# Altium PCB Motor_Controller.PcbDoc
Units mil, origin at the board's own origin, x right, y up, seen from the top; angles counter-clockwise.
Board outline 2175 x 1650 mil, 2 copper layers (Top Layer, Bottom Layer); 86 components, 62 nets, 296 pads, 37 vias.
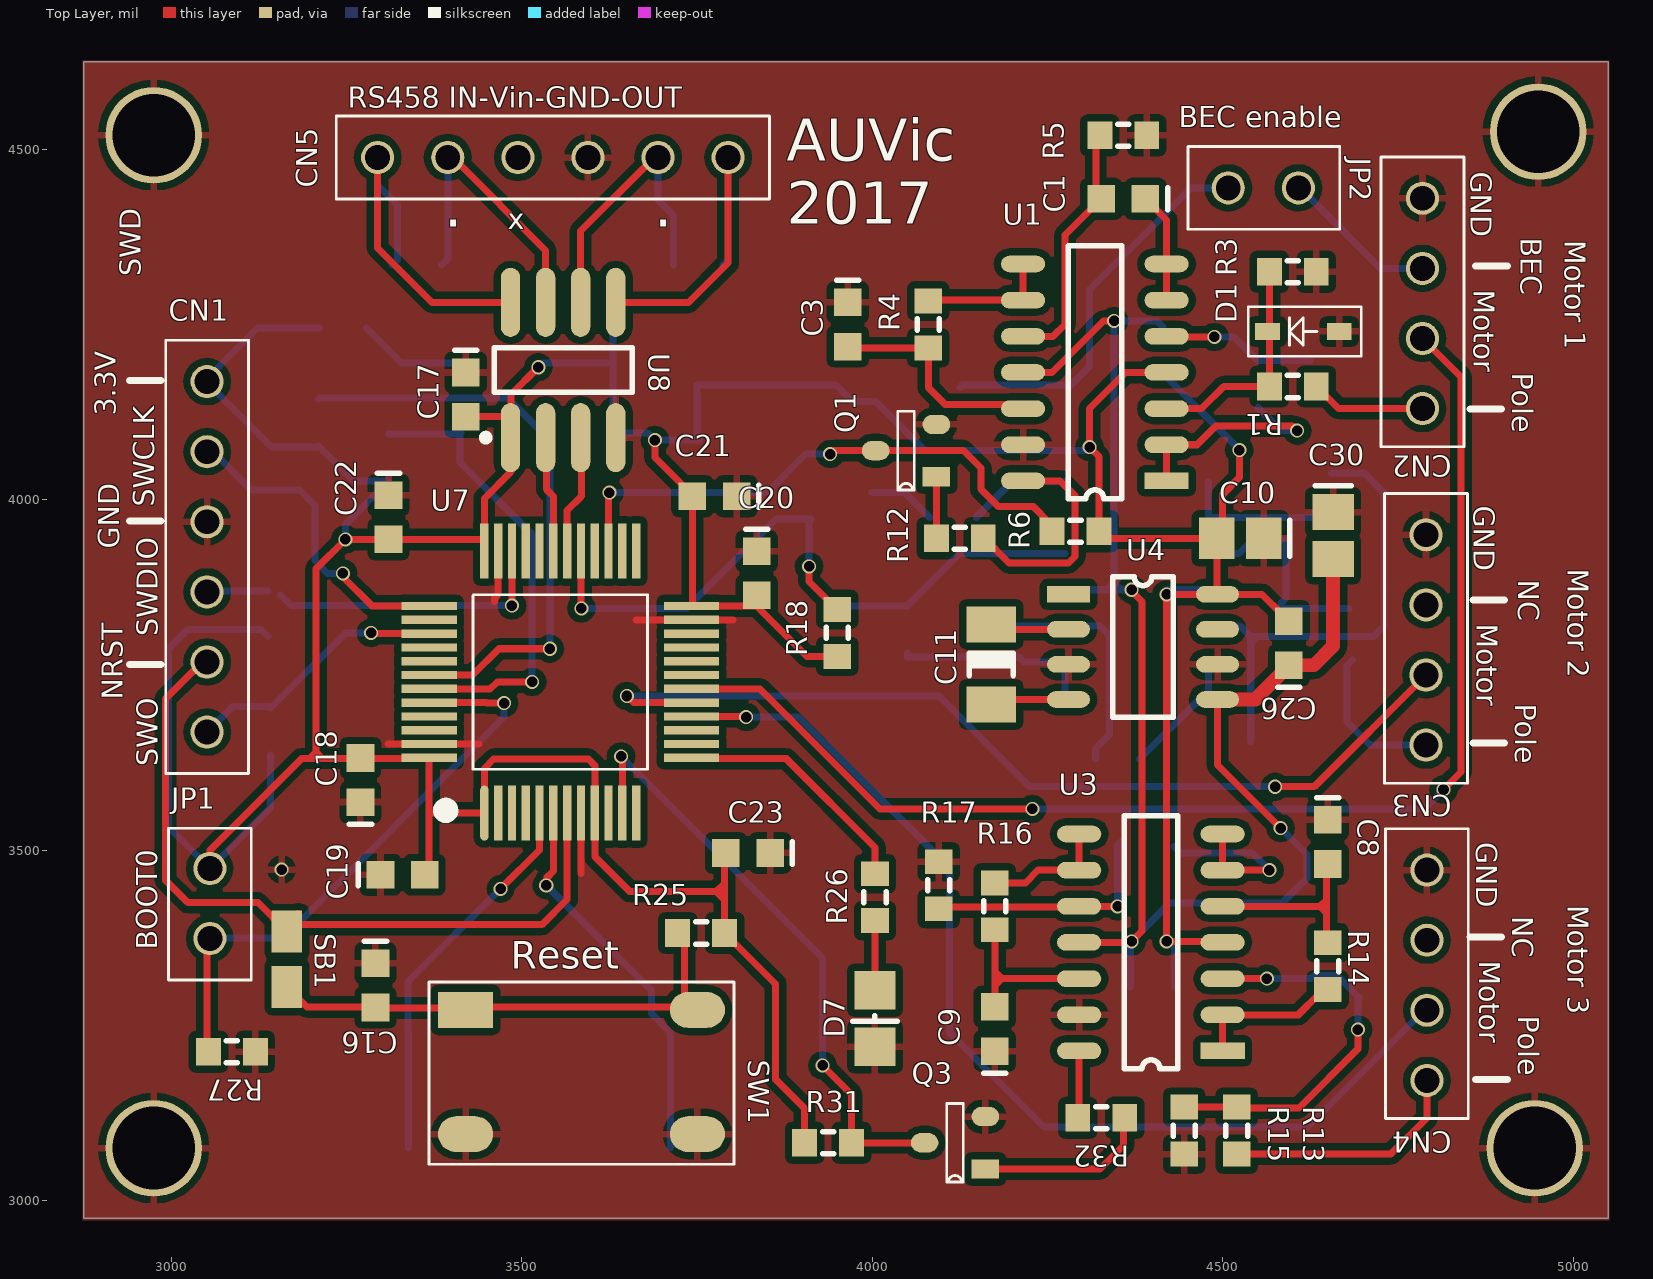
[diagram p0: Top Layer view]
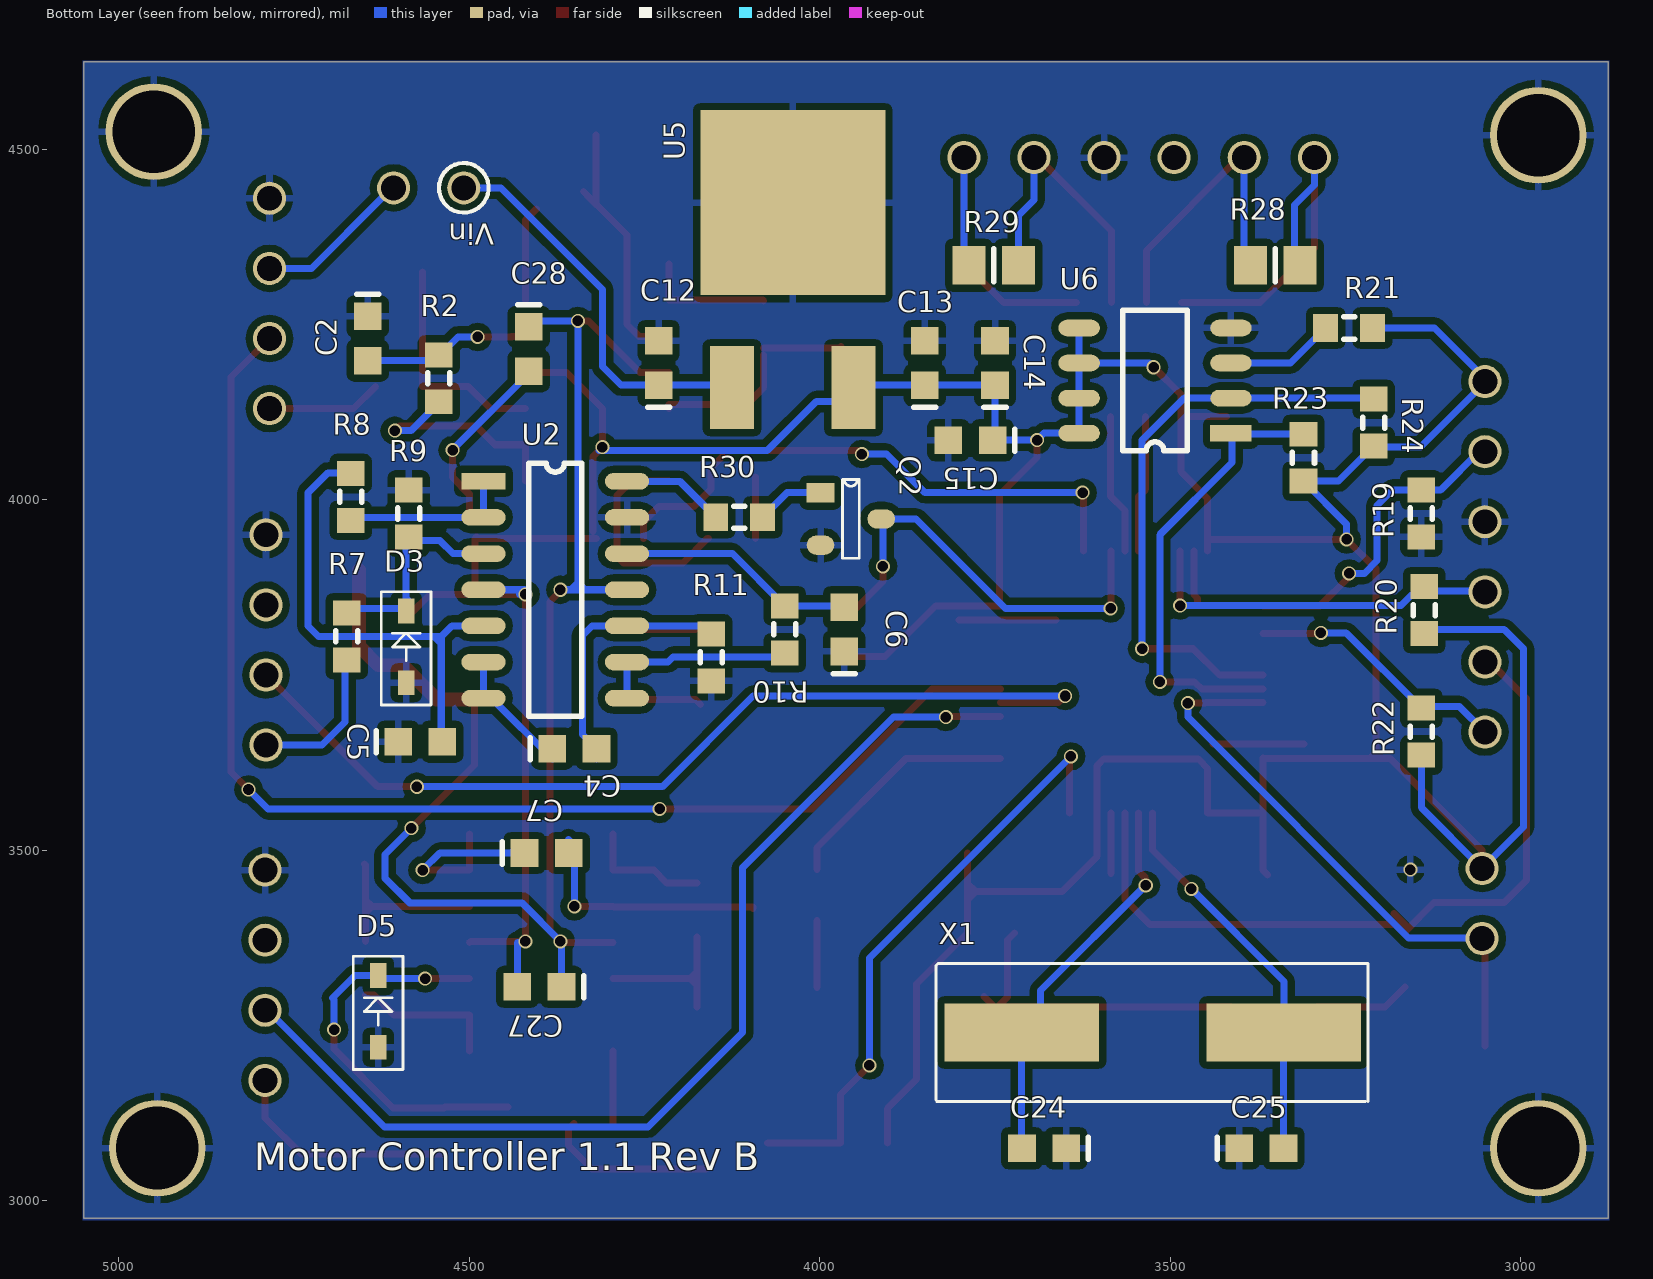
[diagram p1: Bottom Layer view, seen from below]
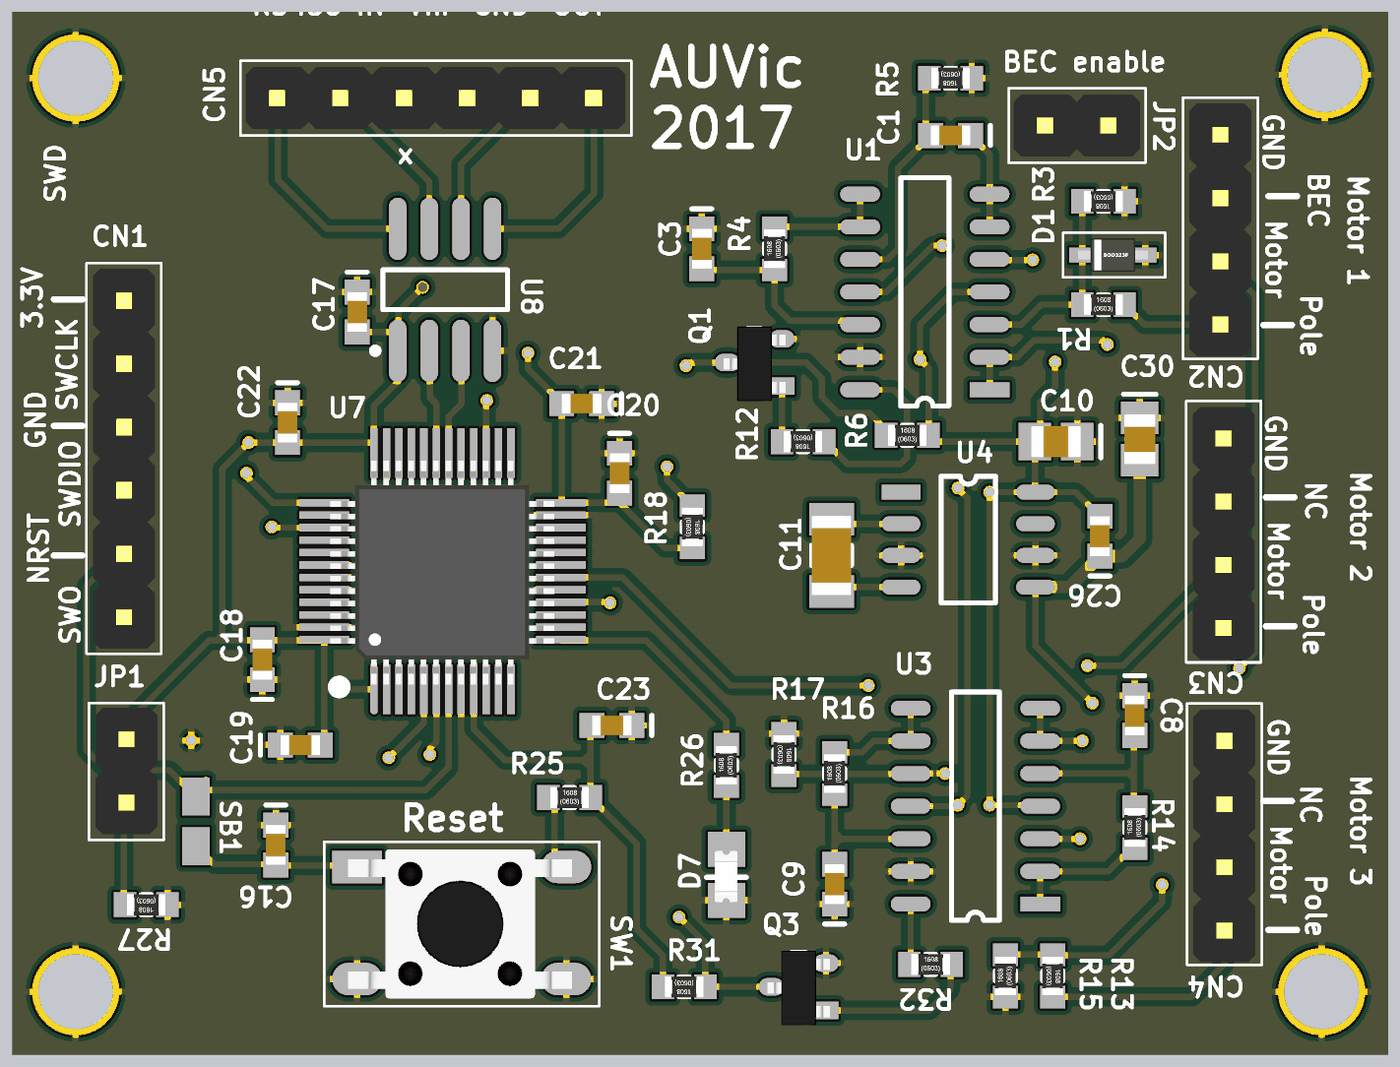
[diagram p2: 3D render of the assembled board from above, using the file's embedded part models]
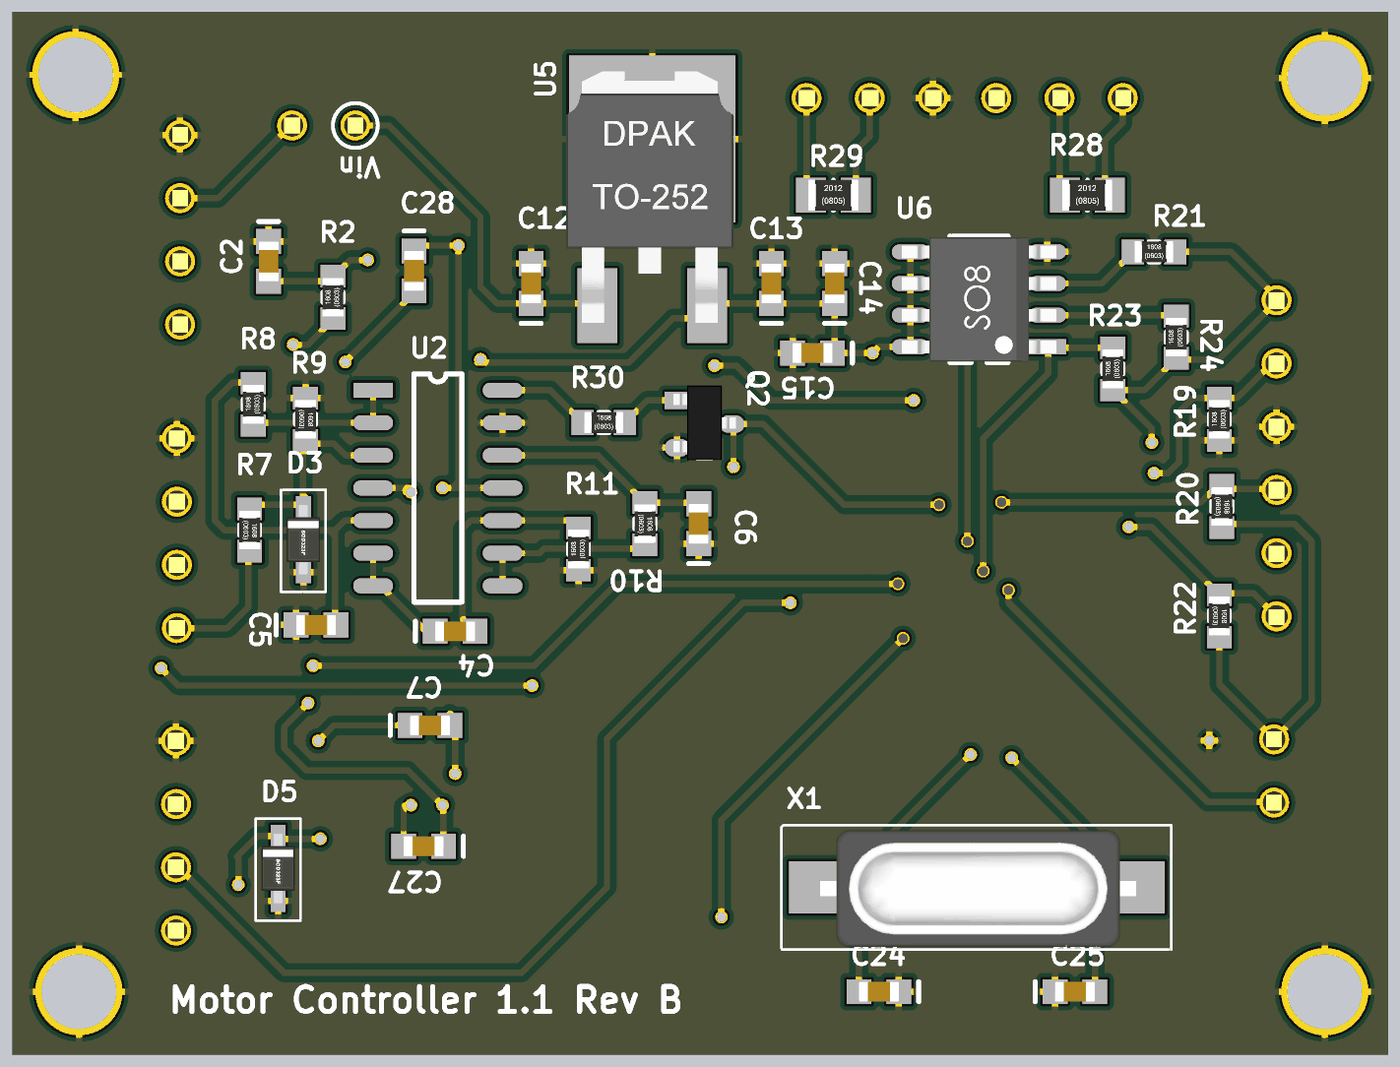
[diagram p3: 3D render of the assembled board from below, using the file's embedded part models]

## Layer stack, top to bottom
Top Solder: solder mask 0.4, Solder Resist, Dk 3.5
Top Layer: signal copper 1.4
Dielectric 1: dielectric 12.6, FR-4, Dk 4.8
Bottom Layer: signal copper 1.4
Bottom Solder: solder mask 0.4, Solder Resist, Dk 3.5

## Board outline
2875,4625 2875,2975 5050,2975 5050,4625

## Design rules (kind name [scope] priority, off if disabled: settings)
Clearance [All] p1: gap=10 except(5: Track-SMDPad SMDPad-SMDPad; 6: Track-Track)
PolygonConnect [All] p1: connectstyle=Relief reliefconductorwidth=10 reliefentries=4 polygonreliefangle="90 Angle" airgapwidth=10
RoutingVias [All] p1: holewidth=28 width=50 viastyle="Through Hole" minholewidth=28 minwidth=50 maxholewidth=28 maxwidth=50
SolderMaskExpansion [All] p1: expansion=4
Width [All] p1: maxlimit=39.37 minlimit=10 preferedwidth=10
30 further rules are at their usual default settings.

## Classes and differential pairs
component class Designator: C12 C13 C14 C15 C16 C17 C18 C19 C20 C21 C22 C23 C24 C25 CN1 CN2 CN3 CN4 CN5 D7 JP1 JP2 R19 R20 R21 R22 R23 R24 R25 R26 R27 R28 R29 SB1 SW1 U5 U6 U7 U8 X1

## Components (designator, comment, footprint, x,y, rotation, side; value= is the part's Value field where it differs from the comment)
C1 "0.1uF, 50V, 10%, X7R, 1608" "CAPC1608N(0603\")" 4358.27,4429.13 r180 top
C2 "0.1uF, 50V, 10%, X7R, 1608" "CAPC1608N(0603\")" 4645,4230 r270 bottom
C3 "0.1uF, 50V, 10%, X7R, 1608" "CAPC1608N(0603\")" 3965,4250 r270 top
C4 "0.1uF, 50V, 10%, X7R, 1608" "CAPC1608N(0603\")" 4350,3645 r180 bottom
C5 "0.1uF, 50V, 10%, X7R, 1608" "CAPC1608N(0603\")" 4570,3655 r180 bottom
C6 "0.1uF, 50V, 10%, X7R, 1608" "CAPC1608N(0603\")" 3965,3815 r90 bottom
C7 "0.1uF, 50V, 10%, X7R, 1608" "CAPC1608N(0603\")" 4389.76,3496.06 r180 bottom
C8 "0.1uF, 50V, 10%, X7R, 1608" "CAPC1608N(0603\")" 4649.61,3511.81 r270 top
C9 "0.1uF, 50V, 10%, X7R, 1608" "CAPC1608N(0603\")" 4175,3245 r90 top
C10 "4.7µF" "CAPC2012N(0805\")" 4525,3945 r180 top
C11 "10µF" "CAPC3216N(1206\")" 4170,3765 r90 top
C12 "1μF" "CAPC1608N(0603\")" 4230,4195 r90 bottom
C13 "2.2µF" "CAPC1608N(0603\")" 3850,4195 r90 bottom
C14 "1μF" "CAPC1608N(0603\")" 3750,4195 r90 bottom
C15 "0.1μF" "CAPC1608N(0603\")" 3785,4085 r0 bottom
C16 "0.1μF" "CAPC1608N(0603\")" 3291.34,3307.09 r270 top
C17 "0.1μF" "CAPC1608N(0603\")" 3420,4150 r270 top
C18 "0.1μF" "CAPC1608N(0603\")" 3270,3600 r90 top
C19 "0.1μF" "CAPC1608N(0603\")" 3330,3465 r0 top
C20 "0.1μF" "CAPC1608N(0603\")" 3835,3895 r270 top
C21 "1μF" "CAPC1608N(0603\")" 3775,4005 r180 top
C22 "0.1μF" "CAPC1608N(0603\")" 3310,3975 r270 top
C23 "1μF" "CAPC1608N(0603\")" 3822.83,3496.06 r180 top
C24 "30pF" "CAPC1608N(0603\")" 3680,3075 r0 bottom
C25 "30pF" "CAPC1608N(0603\")" 3370,3075 r180 bottom
C26 "0.1μF" "CAPC1608N(0603\")" 4594.49,3795.28 r90 top
C27 "0.1μF" "CAPC1608N(0603\")" 4400,3305 r0 bottom
C28 "0.1μF" "CAPC1608N(0603\")" 4415,4215 r270 bottom
C30 "10µF" "CAPC2012N(0805\")" 4657.48,3948.82 r270 top
CN1 "Header Male 1x6" "Header, Male, 1X6" 3051.18,4168.5 r270 top
CN2 "Header Male 1x4" "Header, Male, 1X4" 4785,4430 r270 top
CN3 "Header Male 1x4" "Header, Male, 1X4" 4790,3950 r270 top
CN4 "Header Male 1x4" "Header, Male, 1X4" 4791.34,3471.65 r270 top
CN5 "Header Male 1x6" "Header, Male, 1X6" 3794.49,4488.19 r180 top
D1 "ZENER MM3Z3V0ST1G" SC-90 4615,4240 r180 top
D3 "ZENER MM3Z3V0ST1G" SC-90 4590,3790 r90 bottom
D5 "ZENER MM3Z3V0ST1G" SC-90 4630,3270 r90 bottom
D7 "Red" LED0805 4003.94,3259.84 r270 top
JP1 "1X2 Pin Head" "2X1 Males Header" 3055.12,3374.02 r90 top
JP2 "1X2 Pin Head" "2X1 Males Header" 4607.87,4444.88 r180 top
Q1 "BC846B,215" SOT-23 4087.68,4032.6 r180 top
Q2 "BC846B,215" SOT-23 3995,4010 r180 bottom
Q3 "BC846B,215" SOT-23 4157.48,3045.28 r180 top
R1 "100k" "RESC1608N(0603\")" 4600,4161.54 r0 top
R2 "11k" "RESC1608N(0603\")" 4543.31,4173.23 r90 bottom
R3 "10k" "RESC1608N(0603\")" 4600,4325 r180 top
R4 "16k" "RESC1608N(0603\")" 4080,4250 r90 top
R5 "16k" "RESC1608N(0603\")" 4358.27,4519.69 r180 top
R6 "10k" "RESC1608N(0603\")" 4290,3955 r0 top
R7 "100k" "RESC1608N(0603\")" 4675,3805 r270 bottom
R8 "11k" "RESC1608N(0603\")" 4669.29,4003.94 r90 bottom
R9 "10k" "RESC1608N(0603\")" 4586.61,3980.32 r270 bottom
R10 "16k" "RESC1608N(0603\")" 4050,3815 r270 bottom
R11 "16k" "RESC1608N(0603\")" 4155,3775 r90 bottom
R12 "100k" "RESC1608N(0603\")" 4125,3945 r180 top
R13 "100k" "RESC1608N(0603\")" 4520,3100 r270 top
R14 "11k" "RESC1608N(0603\")" 4649.61,3334.65 r90 top
R15 "10k" "RESC1608N(0603\")" 4445,3100 r90 top
R16 "16k" "RESC1608N(0603\")" 4175,3420 r90 top
R17 "16k" "RESC1608N(0603\")" 4095,3450 r270 top
R18 "10k" "RESC1608N(0603\")" 3950,3810 r270 top
R19 "10k" "RESC1608N(0603\")" 3141.73,3980.32 r90 bottom
R20 "10k" "RESC1608N(0603\")" 3137.8,3842.52 r270 bottom
R21 "100k" "RESC1608N(0603\")" 3245,4245 r180 bottom
R22 "10k" "RESC1608N(0603\")" 3141.73,3669.29 r270 bottom
R23 "3.32k" "RESC1608N(0603\")" 3310,4060 r90 bottom
R24 "3.32k" "RESC1608N(0603\")" 3210,4110 r90 bottom
R25 "100k" "RESC1608N(0603\")" 3755.91,3381.89 r0 top
R26 "715R" "RESC1608N(0603\")" 4003.94,3433.07 r90 top
R27 "10k" "RESC1608N(0603\")" 3086.61,3212.6 r180 top
R28 "0R" "RESC2012N(0805\")" 3350.39,4334.65 r180 bottom
R29 "0R" "RESC2012N(0805\")" 3751.97,4334.65 r180 bottom
R30 "100k" "RESC1608N(0603\")" 4115,3975 r180 bottom
R31 "10k" "RESC1608N(0603\")" 3937.01,3082.68 r180 top
R32 "100k" "RESC1608N(0603\")" 4326.77,3118.11 r0 top
SB1 "Solder Bridge" "Solder Bridge" 3165,3305 r180 top
SW1 "SPST" 4-SPST-NO 3427.87,3272.17 r0 top
U1 "Quad Op Amp TSV324" SOP-14 4420,4026.85 r180 top
U2 "Quad Op Amp TSV324" SOP-14 4479.72,4026.3 r180 bottom
U3 "Quad Op Amp TSV324" SOP-14 4500,3213.7 r180 top
U4 "CMOS Voltage Converter" 8-SOIC 4280,3865 r0 top
U5 "3.3V Lin Reg 30Vin" T0-252 4038.39,4423.78 r270 bottom
U6 "Temperature Sensor" SOIC-8 3417.4,4095 r0 bottom
U7 "STM32F091CCT6" STM-48LQFP 3555,3740 r0 top
U8 "Full duplex Intersil UART - RS485" SOIC-SN8_M 3559.06,4185.04 r90 top
X1 "4MHz" HC49/US 3525,3240 r180 bottom

## Footprints (in the part's own frame and the unit in brackets; to place one, negate y for a bottom-side part, rotate by r counter-clockwise, add the part's x,y. Pads: shape width x height; smd on the part's side, far side on the other; paste and mask are expansions set on the pad)
"2X1 Males Header" [mm]
  round 1.2 hole 0.9: 1(0,0) 2(2.54,0)
  silkscreen extent -1.5,-1.5 4,1.5, body extent -1.27,-1.24 3.81,1.25, height 8.54
4-SPST-NO [mm]
  rect 2x1.3 smd: 1(-0.2,0)
  oval 2x1.3 smd: 2(8.2,0) 3(-0.2,-4.5) 4(8.2,-4.5)
  silkscreen extent -1.52,-5.59 9.53,1.02, body extent -0.56,-5.29 8.44,0.71, height 5
8-SOIC [mm]
  rect 1.55x0.6 smd: 1(0,0)
  oval 1.55x0.6 smd: 2(0,-1.27) 3(0,-2.54) 4(0,-3.81) 5(5.4,-3.81) 6(5.4,-2.54) 7(5.4,-1.27) 8(5.4,0)
  silkscreen extent 1.61,-4.44 3.79,0.64, body extent 1.61,-4.45 3.79,0.64, height 1.8
"CAPC1608N(0603\")" [mm] "Chip Capacitor, Body 1.6x0.8mm (0603\"), IPC Medium Density"
  rect 1x1 smd: 1(-0.8,0) 2(0.8,0)
  silkscreen extent -1.6,-0.4 -1.6,0.4, body extent -0.8,-0.4 0.8,0.4, height 0.9
"CAPC2012N(0805\")" [mm] "Chip Capacitor, Body 2.0x1.3mm (0805\"), IPC Medium Density"
  rect 1.3x1.5 smd: 1(-0.85,0) 2(0.85,0)
  silkscreen extent -1.8,-0.65 -1.8,0.65, body extent -1,-0.62 1,0.63, height 1
"CAPC3216N(1206\")" [mm] "Chip Capacitor, Body 3.2x1.6mm (1206\"), IPC Medium Density"
  rect 1.3x1.8 smd: 1(-1.45,0) 2(1.45,0)
  silkscreen extent -0.4,-0.8 0.4,0.8, body extent -1.6,-0.8 1.6,0.8, height 1
HC49/US [mm]
  rect 5.6x2.1 smd: 1(-4.75,0) 2(4.75,0)
  silkscreen extent -7.85,-2.5 7.8,2.5, body extent -6.3,-2.4 6.4,2.3, height 4.2
"Header, Male, 1X4" [mm]
  round 1.2 hole 0.9: 1(0,0) 2(2.54,0) 3(5.08,0) 4(7.62,0)
  silkscreen extent -1.5,-1.5 9,1.5, body extent -1.27,-1.24 8.89,1.25, height 8.54
"Header, Male, 1X6" [mm]
  round 1.2 hole 0.9: 1(0,0) 2(2.54,0) 3(5.08,0) 4(7.62,0) 5(10.16,0) 6(12.7,0)
  silkscreen extent -1.5,-1.5 14.2,1.5, body extent -1.27,-1.24 14,1.25, height 8.54
LED0805 [mm]
  rect 1.4x1.5 smd: A(-1.025,0) K(1.025,0)
  silkscreen extent -0.1,-0.8 0.1,0.8, body extent -0.96,-0.46 1.1,0.45, height 0.85
"RESC1608N(0603\")" [mm] "Chip Resistor, Body 1.6x0.8mm (0603\"), IPC Medium Density"
  rect 0.9x1 smd: 1(-0.85,0) 2(0.85,0)
  silkscreen extent -0.2,-0.4 0.2,0.4, body extent -0.77,-0.42 0.78,0.43, height 0.44
"RESC2012N(0805\")" [mm] "Chip Resistor, Body 2.0x1.3mm (0805\"), IPC Medium Density"
  rect 1.2x1.4 smd: 1(-0.9,0) 2(0.9,0)
  silkscreen extent 0,-0.6 0,0.6, body extent -1,-0.62 1,0.63, height 0.45
SC-90 [mm]
  rect 0.9x0.6 smd: A(-1.3,0) K(1.3,0)
  silkscreen extent -2.1,-0.9 2,0.9, body extent -1.4,-0.68 1.4,0.68, height 0.75
SOIC-8 [mm]
  rect 1.5x0.6 smd: 1(-0.1,0)
  oval 1.5x0.6 smd: 2(-0.1,-1.27) 3(-0.1,-2.54) 4(-0.1,-3.81) 5(5.4,-3.81) 6(5.4,-2.54) 7(5.4,-1.27) 8(5.4,0)
  silkscreen extent 1.48,-4.44 3.82,0.64, body extent -0.45,-4.4 5.75,0.6, height 1.75
SOIC-SN8_M [mm] "SOIC, 8-Leads, Body 4.9x3.8mm, Pitch 1.27mm, IPC Low Density"
  oval 2.5x0.7 smd: 1(-2.45,1.905) 2(-2.45,0.635) 3(-2.45,-0.635) 4(-2.45,-1.905) 5(2.45,-1.905) 6(2.45,-0.635) 7(2.45,0.635) 8(2.45,1.905)
  silkscreen extent -2.57,-2.5 0.8,2.93, body extent -2,-2.5 2,2.5, height 1.75
"Solder Bridge" [mm]
  rect 1.1x1.524 smd: 1(0,0) 2(0,-2)
SOP-14 [mm]
  rect 1.6x0.6 smd: 1(0,0)
  oval 1.6x0.6 smd: 2(0,-1.31) 3(0,-2.62) 4(0,-3.93) 5(0,-5.24) 6(0,-6.55) 7(0,-7.86) 8(5.2,-7.86) 9(5.2,-6.55) 10(5.2,-5.24) 11(5.2,-3.93) 12(5.2,-2.62) 13(5.2,-1.31) 14(5.2,0)
  silkscreen extent 1.63,-8.51 3.57,0.65, body extent -0.28,-8.52 5.46,0.66, height 1.8
SOT-23 [mm]
  rect 1x0.7 smd: 1(-0.1,0)
  oval 1x0.7 smd: 2(-0.1,-1.9) 3(2.1,-0.95)
  silkscreen extent 0.7,-2.38 1.3,0.48, body extent -0.25,-2.4 2.25,0.6, height 1.06
STM-48LQFP [mm]
  oval 0.3x2 smd: 1(-2.75,-4.75)
  rect 0.3x2 smd: 2(-2.25,-4.75) 3(-1.75,-4.75) 4(-1.25,-4.75) 5(-0.75,-4.75) 6(-0.25,-4.75) 7(0.25,-4.75) 8(0.75,-4.75) 9(1.25,-4.75) 10(1.75,-4.75) 11(2.25,-4.75) 12(2.75,-4.75) 25(2.75,4.75) 26(2.25,4.75) 27(1.75,4.75) 28(1.25,4.75) 29(0.75,4.75) 30(0.25,4.75) 31(-0.25,4.75) 32(-0.75,4.75) 33(-1.25,4.75) 34(-1.75,4.75) 35(-2.25,4.75) 36(-2.75,4.75)
  rect 2x0.3 smd: 13(4.75,-2.75) 14(4.75,-2.25) 15(4.75,-1.75) 16(4.75,-1.25) 17(4.75,-0.75) 18(4.75,-0.25) 19(4.75,0.25) 20(4.75,0.75) 21(4.75,1.25) 22(4.75,1.75) 23(4.75,2.25) 24(4.75,2.75) 37(-4.75,2.75) 38(-4.75,2.25) 39(-4.75,1.75) 40(-4.75,1.25) 41(-4.75,0.75) 42(-4.75,0.25) 43(-4.75,-0.25) 44(-4.75,-0.75) 45(-4.75,-1.25) 46(-4.75,-1.75) 47(-4.75,-2.25) 48(-4.75,-2.75)
  silkscreen extent -4.36,-4.86 3.16,3.16, body extent -4.51,-4.55 4.49,4.45, height 1.56
T0-252 [mm]
  rect 6.7x6.7 smd: 1(0,0)
  rect 3x1.6 smd: 2(6.7,-2.2) 3(6.7,2.2)
  body extent -2.7,-3.47 7.4,3.27, height 2.37

## Part data
C1 C2 C3 C4 C5 C6 C7 C8 C9: "CAP CER 0.1UF 50V 10% X7R 1608 (0603)"
C10: library part "4.7uF 35V 0805 SMD, Ceramic", "Capacitor, Ceramic, 35V, +/- 10%, 0805 SMD, X5R"
C11: library part "10uF 50V 1206 SMD, Ceramic", "Capacitor, Ceramic, 50V, +/- 10%, 1206 SMD, X5R"
C12 C14 C21 C23: library part "1uF 25V 0603 SMD, Ceramic", "Capacitor, Ceramic, 25V, +/- 10%, 0603 SMD, X5R"
C13: library part "2.2uF, 50V, 0603 SMD, X5R, Ceramic", "Capacitor, Ceramic, 50V, 10%, 0603 SMD, X5R"
C15 C16 C17 C18 C19 C20 C22 C26 C27 C28: library part "0.1uF 100V 0603 SMD, Ceramic", "Capacitor, Ceramic, 100V, +/- 10%, 0603 SMD, X7R"
C24 C25: library part "30pF 50V 0603 SMD, Ceramic", "Capacitor, Ceramic, 50V, +/-1%, 0603 SMD, C0G"
C30: library part "10uF 10V 0805 SMD, Ceramic", "Capacitor, Ceramic, 10V, +/- 10%, 0805 SMD, X5R"
CN1 CN5: library part "Header, Male, 1x6", "1x6, Pads Pitch: 0.1\" (2.54mm), Through hole"
CN2 CN3 CN4: library part "Header, Male, 1x4", "1x4, Pads Pitch: 0.1\" (2.54mm), Through hole"
D1 D3 D5: "DIODE ZENER 11V 200MW ±5% SOD323"
D7: library part "LED, 0805 (2012), Green, Clear", "LED, 0805 (2012), Green, Clear"
JP1 JP2: library part "1x2 Male Header"
Q1 Q2 Q3: "NPN 65V 100mA 250mW"
R1 R7 R12 R13 R21 R25 R30 R32: library part "100kR, 1%, 1/10W, 0603 SMD", "100kR, 1%, 1/10W, 0603 SMD"
R2 R8 R14: library part "11kR, 1%, 1/10W, 0603 SMD", "11kR, 1%, 1/10W, 0603 SMD"
R3 R6 R9 R15 R18 R19 R20 R22 R27 R31: library part "10kR, 1%, 1/10W, 0603 SMD", "10kR, 1%, 1/10W, 0603 SMD"
R4 R5 R10 R11 R16 R17: library part "16kR, 1%, 1/10W, 0603 SMD", "16kR, 1%, 1/10W, 0603 SMD"
R23 R24: library part "3.32k, 1%, 1/10W, 0603, SMD", "3.32k, 1%, 1/10W, 0603, SMD"
R26: library part "715R, 1%, 1/10W, 0603, SMD", "715R, 1%, 1/10W, 0603, SMD"
R28 R29: library part "0R, 1%, 1/8W, 0805 SMD", "0R, 1%, 1/8W, 0805 SMD"
SW1: library part "4 pin Tacitle Switch"
U1 U2 U3: "TSV324"
U4: library part TL7660
U5: library part "3.3V TO-252 Linear Regulator"
U6: library part "LM75B (Temperature Sensor)"
U7: "LQFP48 Chip"
X1: library part "Oscillator 4MHz", "4Mhz 150ESR  20pF -20°C ~ 70°C"

## Free pads (board coordinates)
  round 137.8 hole 118.11: 2(2975,3075) 2(2975,4520) 2(4945,3075) 2(4950,4525)

## Via types
v1: diameter 20, hole 15, Top Layer to Bottom Layer, 37 vias

## Nets (pads, with @x,y where several pads share a name; then routed paths per layer and width w, separated by ;. In a path a pad name is that pad's centre, name@x,y a point inside that pad or via, vN(x,y) a via of type N, cw(c..) or ccw(c..) an arc to the next point about the centre after c; other vN are vias at no path point)
3.3V: C10.2 C13.1 C14.1 C15.1 C17.2 C18.2 C19.2 C20.2 C21.2 C22.2 C23.2 C26.2 C27.2 C28.2 CN1.1 JP1.2 R6.2 R18.2 R20.2 R21.2 R22.2 R23.1 R24.1 R25.2 R31.2 U1.4 U2.4 U3.4 U4.8 U5.3 U6.5 U6.6 U6.7 U6.8 U7.1 U7.9 U7.24 U7.36 U7.48 U8.1 | length 7230
  Top Layer w10: JP1.2 3055.12,3500 3185.63,3630.51 3197.05,3630.51 ; C19.2 3367.99,3471.5 3367.99,3555 ; U7.48 U7.48@3367.99,3630.51 ; C17.2 U8.1@3484.96,4118.5 ; U7.36 U7.36@3446.73,3943.27 ; v1(3523.62,4188.98) 3484.96,4150.31 U8.1@3484.96,4118.5 ; v1(3690,4085) 3690,4060 3743.5,4006.5 C21.2 3743.5,3850.98 U7.24@3742.01,3849.49 ; U7.24 3834.76,3848.27 3835,3848.5 3906.97,3776.54 R18.2 ; R25.2@3789.05,3382.2 3789.05,3429.13 ; C23.2@3789.05,3496.06 3789.05,3452.76 ; R25.2 3862.2,3309.06 3862.2,3173.23 3903.54,3131.89 R31.2 ; R6.2@4318.46,3945 C10.2 ; R6.2 4323.46,4061.54 v1(4310,4075) 4310,4130 4361.57,4181.57 U1.4 ; C10.2@4490,3946.54 C10.2 ; U3.4 4498.43,3370 v1(4420,3370) v1(4420,3865) U4.8 ; C10.2@4500,3974.41 4500,4007.87 4523.62,4031.5 v1(4523.62,4070.87) ; C26.2@4584.65,3836.61 4556.26,3865 U4.8 ; 3197.05,3630.51 3216.02,3630.51 ; 3197.05,3630.51 3206.54,3640 ; 3206.54,3640 3216.02,3630.51 ; 3206.54,3640 3206.54,3901.54 v1(3248.5,3943.5) C22.2 3310.24,3943.27 U7.36@3446.73,3943.27 ; 3216.02,3630.51 U7.48@3367.99,3630.51 ; 3367.99,3555 3370,3552.99 U7.1 3446.73,3616.73 3460,3630 3595,3630 3604.21,3620.79 U7.9 3604.21,3490.79 3654.06,3440.94 3777.24,3440.94 ; 3367.99,3555 U7.48@3367.99,3630.51 ; U7.36@3446.73,3943.27 3446.73,4001.73 3484.96,4039.96 U8.1@3484.96,4118.5 ; 3777.24,3440.94 3789.05,3452.76 ; 3777.24,3440.94 3789.05,3440.94 ; 3777.24,3440.94 3789.05,3429.13 ; 3789.05,3429.13 3789.05,3440.94 ; 3789.05,3440.94 3789.05,3452.76 ; C10.2 4491.54,3866.06 U4.8
  Bottom Layer w10: R20.2@3137.8,3805.12 3127.95,3814.96 3023.62,3814.96 2996.06,3787.4 2996.06,3533.07 JP1.2 3141.73,3560.63 R22.2 ; R21.2 3122.95,4245 3047.95,4170 3142.95,4075 3208.46,4075 R24.1 3260,4026.54 R23.1 3248.5,3965.04 v1(3248.5,3943.5) ; v1(3523.62,4188.98) 3529.65,4195 U6.6 ; U6.5 U6.6 ; v1@4315,4070 v1(4310,4075) 4305,4070 4075,4070 4005,4140 3971.77,4140 U5.3 3948.27,4163.5 C13.1 C14.1 3750,4088.5 C15.1 v1(3690,4085) 3680,4095 U6.8 U6.7 U6.6 ; C28.2 4415,4180 4523.62,4071.38 v1(4523.62,4070.87) ; v1(4420,3370) 4431.5,3368.5 C27.2 ; v1(4420,3865) 4428.15,3865 4421.57,3871.57 U2.4
-3.3V: C26.1 C27.1 C28.1 C30.2 U1.11 U2.11 U3.11 U4.5 | length 2297
  Top Layer w10: U1.11 4256.57,4181.57 4330,4255 v1(4345,4255) ; U3.11 4368.43,3368.43 v1(4370,3370) 4385,3385 4385,3855 4370.08,3869.92 v1(4370.08,3871.57) ; U4.5 4492.6,3621.57 v1(4582.68,3531.5)
  Top Layer w19.68: U4.5 4547.24,3715 ; 4547.24,3716.54 C26.1 4629.92,3763.78 4657.48,3791.34 C30.2@4657.48,3899.61
  Bottom Layer w10: U2.11 4334.96,3871.57 ; C27.1 4368.5,3368.5 v1(4370,3370) 4425,3425 4585,3425 4620,3460 4620,3494.17 v1(4582.68,3531.5) ; v1@4369.83,3871.56 v1(4370.08,3871.57) 4355.04,3871.57 ; C28.1 4406.5,4255 v1(4345,4255) 4345,3881.61 ; 4334.96,3871.57 4345,3881.61 ; 4334.96,3871.57 4340,3871.57 ; 4340,3871.57 4345,3876.57 4345,3881.61 ; 4340,3871.57 4355.04,3871.57 ; 4345,3881.61 4355.04,3871.57
BOOT0: JP1.1 R27.2 U7.44 | length 835
  Top Layer w10: R27.2@3051.18,3220.47 JP1.1@3051.18,3374.02 ; U7.44 3449.53,3710.47 3450,3710 v1(3475,3710)
  Bottom Layer w10: JP1.1@3051.18,3375 3160,3375 3475,3690 v1(3475,3710)
GND: C2.1 C3.1 C5.1 C6.1 C8.1 C9.1 C10.1 C12.2 C13.2 C14.2 C15.2 C16.1 C17.1 C18.1 C19.1 C20.1 C21.1 C22.1 C23.1 C24.1 C25.1 C30.1 CN1.3 CN2.1 CN3.1 CN4.1 CN5.3 D1.A D3.A D5.A D7.K pad.2 Q1.2 Q2.2 Q3.2 R3.1 R5.1 R9.1 R11.1 R15.1 R17.1 R19.1 R27.1 SW1.3 SW1.4 U1.13 U2.13 U3.13 U4.3 U4.6 U5.1 U6.4 U7.8 U7.23 U7.35 U7.47 U8.4 | length 428.5
  Top Layer w10: 3309.21,3651.42 U7.47 3438.82,3651.42 ; 3461.1,3854.8 3461.1,3859.25 3466.42,3864.57 U7.35 ; 3584.53,3466.65 U7.8 ; 3663.23,3828.58 U7.23 3801.34,3828.58
  other v1: 3157.48,3472.44
GREEN: R26.2 U7.13 | length 345.9
  Top Layer w10: U7.13@3742.01,3630.51 3877.36,3630.51 4003.94,3503.94 R26.2@4003.94,3472.44
MOTOR1: CN2.3 U7.18 | length 1831.8
  Top Layer w10: U7.18 3789.84,3730.16 3790,3730 3840,3730 4010.94,3559.06 v1(4228.35,3559.06) ; CN2.3 4840,4175 4840,3611.65 v1(4814.96,3586.61)
  Bottom Layer w10: v1(4228.35,3559.06) 4787.4,3559.06 v1(4814.96,3586.61)
MOTOR2: CN3.3 U7.17 | length 1355.6
  Top Layer w10: v1(3650,3720) 3659.53,3710.47 U7.17 ; v1(4574.8,3590.55) 4630.55,3590.55 CN3.3
  Bottom Layer w10: v1(3650,3720) 4095,3720 4224.45,3590.55 v1(4574.8,3590.55)
MOTOR3: CN4.3 U7.16 | length 1497.5
  Top Layer w10: U7.16 3819.21,3690.79 v1(3820,3690)
  Bottom Layer w10: v1(3820,3690) 3895,3690 4110,3475 4110,3240 4245,3105 4620.75,3105 CN4.3@4789.37,3273.62
NetC1_1: C1.1 U1.6 U1.7 | length 136.2
  Top Layer w10: C1.1@4404.45,4414.45 4420,4398.9 U1.7 U1.6
NetC1_2: C1.2 R5.2 U1.10 | length 407
  Top Layer w10: U1.10 4258.15,4233.15 4275,4250 4275,4377.36 4337.32,4439.69 C1.2 4318.9,4421.26 R5.2@4318.9,4520
NetC2_2: C2.2 R2.2 U1.5 | length 221.1
  Top Layer w10: U1.5 4440.08,4233.15 4439.21,4232.28 v1(4488.19,4232.28)
  Bottom Layer w10: v1(4488.19,4232.28) 4516.18,4232.28 4550,4198.46 4624.96,4198.46 4625,4198.5
NetC3_2: C3.2 R4.1 U1.12 | length 308.7
  Top Layer w10: C3.2@3970,4218.5 3971.97,4216.54 R4.1 ; R4.1@4080,4206.54 4080,4160 4103.82,4136.18 4215.28,4136.18 U1.12
NetC4_1: C4.1 U2.6 U2.7 | length 185.8
  Bottom Layer w10: C4.1@4381.5,3630 4468.35,3716.85 U2.7 U2.6
NetC4_2: C4.2 R11.2 U2.10 | length 380.8
  Bottom Layer w10: R11.2@4155,3803.46 4171.54,3820 U2.10 4325,3820 4338.58,3806.42 4338.58,3665.08 C4.2 C4.2@4318.5,3630
NetC5_2: C5.2 R8.2 U2.5 | length 703.6
  Bottom Layer w10: U2.5 4525,3820 4540,3805 ; C5.2@4540,3655 4540,3795 ; R8.2@4655,4038.46 4701.54,4038.46 4730,4010 4730,3820 4715,3805 4550,3805 ; 4540,3795 4550,3805 ; 4540,3795 4540,3805 ; 4540,3805 4550,3805
NetC6_2: C6.2 R10.1 U2.12 | length 341.8
  Bottom Layer w10: C6.2 3966.97,3848.46 R10.1 4124.69,3923.15 U2.12
NetC7_1: C7.1 U3.6 U3.7 | length 272.8
  Top Layer w10: U3.7 U3.6 v1(4566.57,3471.57) v1@4570,3475
  Bottom Layer w10: C7.1@4430.85,3505.65 4440.43,3496.06 4542.09,3496.06 v1(4566.57,3471.57)
NetC7_2: C7.2 R17.2 U3.10 | length 356.5
  Top Layer w10: R17.2 4095,3419.25 4294.53,3419.25 U3.10 v1(4350,3420)
  Bottom Layer w10: v1(4350,3420) 4350,3506.5 C7.2@4358.5,3515
NetC8_2: C8.2 R14.2 U3.5 | length 284.9
  Top Layer w10: U3.5 4639.21,3420 ; R14.2@4648.35,3370.08 4648.35,3410.87 ; C8.2 4648.35,3479.06 4648.35,3429.13 ; 4639.21,3420 4648.35,3410.87 ; 4639.21,3420 4648.35,3420 ; 4639.21,3420 4648.35,3429.13 ; 4648.35,3410.87 4648.35,3420 ; 4648.35,3420 4648.35,3429.13
NetC9_2: C9.2 R16.1 U3.12 | length 249.9
  Top Layer w10: C9.2 4175,3306.85 ; R16.1@4175,3376.54 4175,3326.85 ; U3.12 4185,3316.85 ; 4175,3306.85 4185,3316.85 ; 4175,3306.85 4175,3320 ; 4175,3320 4178.15,3316.85 4185,3316.85 ; 4175,3320 4175,3326.85 ; 4175,3326.85 4185,3316.85
NetC11_1: C11.1 U4.4 | length 112.9
  Top Layer w10: C11.1 4177.09,3715 U4.4
NetC11_2: C11.2 U4.2 | length 112.9
  Top Layer w10: C11.2 4177.09,3815 U4.2
NetC16_2: C16.2 R25.1 SB1.1 SW1.1 SW1.2 | length 689.1
  Top Layer w10: SB1.1 3193.5,3276.5 C16.2@3291.34,3276.5 ; C16.2@3306.65,3274.68 SW1.1@3381.89,3274.68 ; SW1.1@3413.39,3276.5 SW1.2@3746.38,3276.5 ; R25.1 3732.28,3372.05 3732.28,3290.59 SW1.2@3746.38,3276.5 ; SW1.2 SW1.2@3746.38,3276.5 ; SW1.2@3750.71,3276.5 SW1.2@3765.75,3291.54
NetCN2_2: CN2.2 JP2.1 | length 200.6
  Bottom Layer w10: JP2.1@4625.59,4429.53 4725.12,4330 CN2.2
NetCN2_4: CN2.4 R1.2 | length 164.6
  Top Layer w10: R1.2 4665,4130 CN2.4
NetCN3_4: CN3.4 R7.2 | length 218.4
  Bottom Layer w10: R7.2@4685,3771.54 4677.17,3763.7 4677.17,3682.83 4710,3650 CN3.4
NetCN4_4: CN4.4 R13.2 | length 339.1
  Top Layer w10: R13.2@4535,3066.54 4739.76,3066.54 4791.34,3118.11 CN4.4 CN4.4@4791.34,3179.53
NetCN5_1: CN5.1 R29.1 U8.5 | length 490.6
  Top Layer w10: U8.5 3738.19,4281.5 3794.49,4337.8 CN5.1
  Bottom Layer w10: R29.1 3794.49,4341.73 CN5.1
NetCN5_2: CN5.2 R29.2 U8.6 | length 399.4
  Top Layer w10: U8.6 3584.06,4383.27 CN5.2@3685.04,4484.25
  Bottom Layer w10: CN5.2@3694.49,4480.31 3694.49,4427.56 3716.54,4405.51 R29.2
NetCN5_5: CN5.5 R28.1 U8.7 | length 427.2
  Top Layer w10: CN5.5@3392.13,4485.83 3403.94,4485.83 3534.06,4355.71 U8.7
  Bottom Layer w10: R28.1 3394.49,4343.31 CN5.5
NetCN5_6: CN5.6 R28.2 U8.8 | length 519.4
  Top Layer w10: CN5.6 3294.49,4359.06 3372.05,4281.5 U8.8
  Bottom Layer w10: CN5.6 3294.49,4448.82 3322.83,4420.47 3322.83,4342.52 R28.2
NetD1_K: D1.K R1.1 R3.2 U1.3 | length 323.1
  Top Layer w10: U1.3 4470,4130 4501.54,4161.54 R1.1 R3.2
NetD3_K: D3.K R7.1 R9.2 U2.3 | length 318.7
  Bottom Layer w10: U2.3@4483.11,3926.54 U2.3 4523.15,3923.15 4541.54,3941.54 4590.55,3941.54 4590.55,3859.92 4583.82,3853.19 4583.82,3845 R7.1@4680,3845
NetD5_K: D5.K R13.1 R15.2 U3.3 | length 566.6
  Top Layer w10: R15.2 R13.1 4535,3133.46 4535.96,3132.5 4608.64,3132.5 4692.91,3216.77 v1(4692.91,3244.09) ; U3.3 v1(4563.15,3316.85)
  Bottom Layer w10: v1(4563.15,3316.85) 4625.67,3316.85 D5.K 4663.07,3321.18 4695,3289.25 4692.91,3287.17 v1(4692.91,3244.09)
NetD7_A: D7.A R26.1 | length 95.5
  Top Layer w10: D7.A@4003.94,3304.13 R26.1
NetQ1_1: Q1.1 R12.2 | length 87.6
  Top Layer w10: R12.2 4091.61,3945.08 Q1.1
NetQ1_3: Q1.3 R6.1 U7.27 | length 817.9
  Top Layer w10: U7.27 3623.9,4008.9 v1(3625,4010) ; v1(3940,4065) 3945,4070 Q1.3 4130,4070 4155,4045 4155,4015 4180,3990 4230,3990 4251.54,3968.46 R6.1@4251.54,3945
  Bottom Layer w10: v1(3625,4010) 3850,4010 3905,4065 v1(3940,4065)
NetQ2_1: Q2.1 R30.2 | length 97.1
  Bottom Layer w10: Q2.1 4046.54,4010 R30.2
NetQ2_3: Q2.3 R18.1 U7.29 | length 609
  Top Layer w10: U7.29 3584.53,3845.47 v1(3585,3845) ; v1(3910,3905) 3910,3883.46 R18.1
  Bottom Layer w10: v1(3585,3845) 3735,3845 3862.6,3972.6 Q2.3 3910,3970.28 v1(3910,3905)
NetQ3_1: Q3.1 R32.2 | length 245.5
  Top Layer w10: Q3.1 4324.8,3045.28 4358.27,3078.74 4358.27,3102.36 R32.2@4350.39,3110.24
NetQ3_3: Q3.3 R31.1 U7.11 | length 874.4
  Top Layer w10: U7.11 v1@3643.58,3635.71 ; v1(3929.13,3192.91) 3970.47,3151.57 R31.1 Q3.3
  Bottom Layer w10: v1(3641.73,3633.86) 3929.13,3346.46 v1(3929.13,3192.91)
NetR2_1: R2.1 U1.1 U1.2 | length 321.6
  Top Layer w10: U1.1 U1.2 4463.43,4078.43 4490,4105 4599.72,4105 v1(4606.3,4098.43)
  Bottom Layer w10: R2.1@4550,4131.54 4583.11,4098.43 v1(4606.3,4098.43)
NetR4_2: R4.2 U1.8 U1.9 | length 187.4
  Top Layer w10: R4.2 4081.26,4284.72 U1.9 U1.8
NetR8_1: R8.1 U2.1 U2.2 | length 228.2
  Bottom Layer w10: U2.1 U2.2 4651.81,3974.72 R8.1@4655,3971.54
NetR10_2: R10.2 U2.8 U2.9 | length 285.4
  Bottom Layer w10: R10.2 4050,3775.75 4209.25,3775.75 4216.57,3768.43 U2.9 U2.8
NetR12_1: R12.1 U1.14 | length 318.3
  Top Layer w10: R12.1 4160,3945 4195,3910 4280,3910 4289.25,3919.25 4289.25,4005.75 4268.15,4026.85 U1.14
NetR14_1: R14.1 U3.1 U3.2 | length 211.2
  Top Layer w10: U3.1 U3.2 4607.8,3265.28 4636.12,3293.6 R14.1@4647.93,3293.6
NetR16_2: R16.2 U3.8 U3.9 | length 179.4
  Top Layer w10: R16.2 4218.46,3453.46 4236.57,3471.57 U3.9 U3.8
NetR30_1: R30.1 U2.14 | length 148.2
  Bottom Layer w10: R30.1@4148.74,3974.72 R30.1 4199.76,4026.3 U2.14
NetR32_1: R32.1 U3.14 | length 103.5
  Top Layer w10: R32.1@4295.28,3110.24 U3.14
NRST: CN1.5 SB1.2 U7.7 | length 1081.2
  Top Layer w10: CN1.5@3032.8,3757.2 2992.13,3716.54 2992.13,3456.69 3023.62,3425.2 3123.54,3425.2 SB1.2 ; SB1.2@3181.1,3409.84 3165,3393.74 3528.74,3393.74 3564.84,3429.84 U7.7
OSC_IN: C25.2 U7.5 X1.2 | length 555.9
  Top Layer w10: v1(3470,3445) 3525.47,3500.47 U7.5
  Bottom Layer w10: C25.2 3338.5,3239.49 X1.2 3337.99,3312.99 v1(3470,3445)
OSC_OUT: C24.2 U7.6 X1.1 | length 555.7
  Top Layer w10: v1(3535,3450) 3535,3460 3545.16,3470.16 U7.6
  Bottom Layer w10: v1(3535,3450) 3685,3300 3685,3267.01 X1.1 3712.01,3075.51 C24.2
SCL: R24.2 U6.2 U7.42 | length 840.7
  Top Layer w10: U7.42 3429.84,3749.84 3467.4,3787.4 v1(3540,3787.4)
  Bottom Layer w10: R24.2 3211.54,4145 U6.2 3480,4145 3540,4085 v1(3540,3787.4)
SDA: R23.2 U6.1 U7.43 | length 651.3
  Top Layer w10: U7.43 3454.97,3729.99 3465.18,3740.16 v1(3515,3740.16)
  Bottom Layer w10: R23.2 U6.1@3411.93,4093.46 ; U6.1 U6.1@3411.93,4093.46 ; v1(3515,3740.16) 3515,3950 3411.93,4053.07 U6.1@3411.93,4093.46
SWCLK: CN1.2 R19.2 U7.37 | length 457.7
  Top Layer w10: v1(3245,3895) 3245,3890 3286.73,3848.27 U7.37
  Bottom Layer w10: CN1.2@3051.18,4070 3057.95,4070 3114.17,4013.78 R19.2 3183.07,4013.78 3205,3991.85 3205,3913.11 3223.11,3895 v1(3245,3895)
SWDIO: CN1.4 R20.1 U7.34 | length 501.3
  Top Layer w10: v1(3486.1,3848.9) U7.34
  Bottom Layer w10: CN1.4@3051.18,3870 R20.1@3137.8,3870 ; R20.1@3155.83,3864.17 3171.1,3848.9 v1(3486.1,3848.9)
SWO: CN1.6 R22.1 U7.39 | length 377.5
  Top Layer w10: v1(3285,3810) 3286.1,3808.9 U7.39
  Bottom Layer w10: CN1.6 3087.4,3704.72 3139.76,3704.72 R22.1 3248.98,3810 v1(3285,3810)
TEMP_OS: R21.1 U6.3 | length 155.7
  Bottom Layer w10: R21.1 3328.46,4195 U6.3
USART1_RX: U7.31 U8.2 | length 195.7
  Top Layer w10: U8.2@3535,4118.54 3535,4015 3545.16,4004.84 U7.31
USART1_TX: U7.30 U8.3 | length 199.8
  Top Layer w10: U7.30 3564.84,3984.84 ; 3565.16,3984.84 3565.16,3985.16 3585,4005 U8.3@3585,4118.54
Vin: C12.1 JP2.2 U5.2 | length 565.3
  Bottom Layer w10: U5.2 4128.5,4163.5 C12.1 4283.5,4163.5 4310,4190 4310,4300 4454.88,4444.88 JP2.2
pads on no net: CN3.2 CN4.2 CN5.4 U4.1 U4.7 U7.2 U7.3 U7.4 U7.10 U7.12 U7.14 U7.15 U7.19 U7.20 U7.21 U7.22 U7.25 U7.26 U7.28 U7.32 U7.33 U7.38 U7.40 U7.41 U7.45 U7.46

## Polygon pours and split planes (outlines as drawn)
GND on Top Layer "Top GND Plane" (solid, pour order 68): 2874.02,4625.98 2874.02,2972.44 5051.18,2972.44 5051.18,4625.98
GND on Bottom Layer "Bottom GND Plane" (solid, pour order 70): 2874.02,4625.98 2874.02,2972.44 5051.18,2972.44 5051.18,4625.98

## Silkscreen, mask and mechanical layers (free items; w line width, h text height)
Top Overlay:
  lines w10: 2940.55,3764.92 2985.55,3764.92 ; 2940.55,3969.92 2985.55,3969.92 ; 2940.55,4169.92 2985.55,4169.92 ; 4853.03,3376.54 4898.03,3376.54 ; 4853.03,4129.29 4898.03,4129.29 ; 4856.97,3652.91 4901.97,3652.91 ; 4856.97,3856.85 4901.97,3856.85 ; 4860.91,3172.6 4905.91,3172.6 ; 4860.91,4333.23 4905.91,4333.23
  text "RS458 IN-Vin-GND-OUT" at 3251.97,4559.06 h29.53
  text "BEC enable" at 4437.01,4531.5 h29.92
  text "GND" at 4853.98,4467.72 h29.92 r270
  text "AUVic / 2017" at 3877.95,4393.7 h60
  text "." at 3389.76,4389.76 h60
  text "." at 3688.98,4389.76 h60
  text "x" at 3480.32,4385.83 h29.92
  text "BEC" at 4925.2,4374.02 h29.92 r270
  text "Motor 1" at 4988.19,4370.08 h29.92 r270
  text "SWD" at 2956.69,4318.9 h29.92 r90
  text "Motor" at 4858.27,4299.21 h29.92 r270
  text "Pole" at 4913.39,4181.1 h29.92 r270
  text "3.3V" at 2920.55,4119.92 h29.92 r90
  text "GND" at 4857.91,3991.34 h29.92 r270
  text "SWCLK" at 2975.55,3989.92 h29.92 r90
  text "GND" at 2925.55,3929.92 h29.92 r90
  text "Motor 2" at 4992.13,3901.57 h29.92 r270
  text "NC" at 4921.26,3885.83 h29.92 r270
  text "Motor" at 4862.2,3822.83 h29.92 r270
  text "SWDIO" at 2980.55,3804.92 h29.92 r90
  text "NRST" at 2930.55,3714.92 h29.92 r90
  text "Pole" at 4917.32,3708.66 h29.92 r270
  text "SWO" at 2980.55,3619.92 h29.92 r90
  text "GND" at 4861.85,3511.02 h29.92 r270
  text "Motor 3" at 4992.13,3421.26 h29.92 r270
  text "NC" at 4913.39,3405.51 h29.92 r270
  text "BOOT0" at 2980.32,3358.27 h29.92 r90
  text "Motor" at 4866.14,3342.52 h29.92 r270
  text "Reset" at 3484.25,3330.71 h39.37
  text "Pole" at 4921.26,3263.78 h29.92 r270
Bottom Overlay:
  circle w5.91: c4507.87,4444.88 r35.43
  text "Vin" at 4464.57,4393.7 h29.92 r180
  text "Motor Controller 1.1 Rev B" at 4807.09,3043.31 h39.37
Mechanical 1:
  lines w10: 2874.02,2972.44 5051.18,2972.44 5051.18,4625.98 2874.02,4625.98 2874.02,2972.44